# EAGLE board Alimentacion_doble (EAGLE 7.7.0)
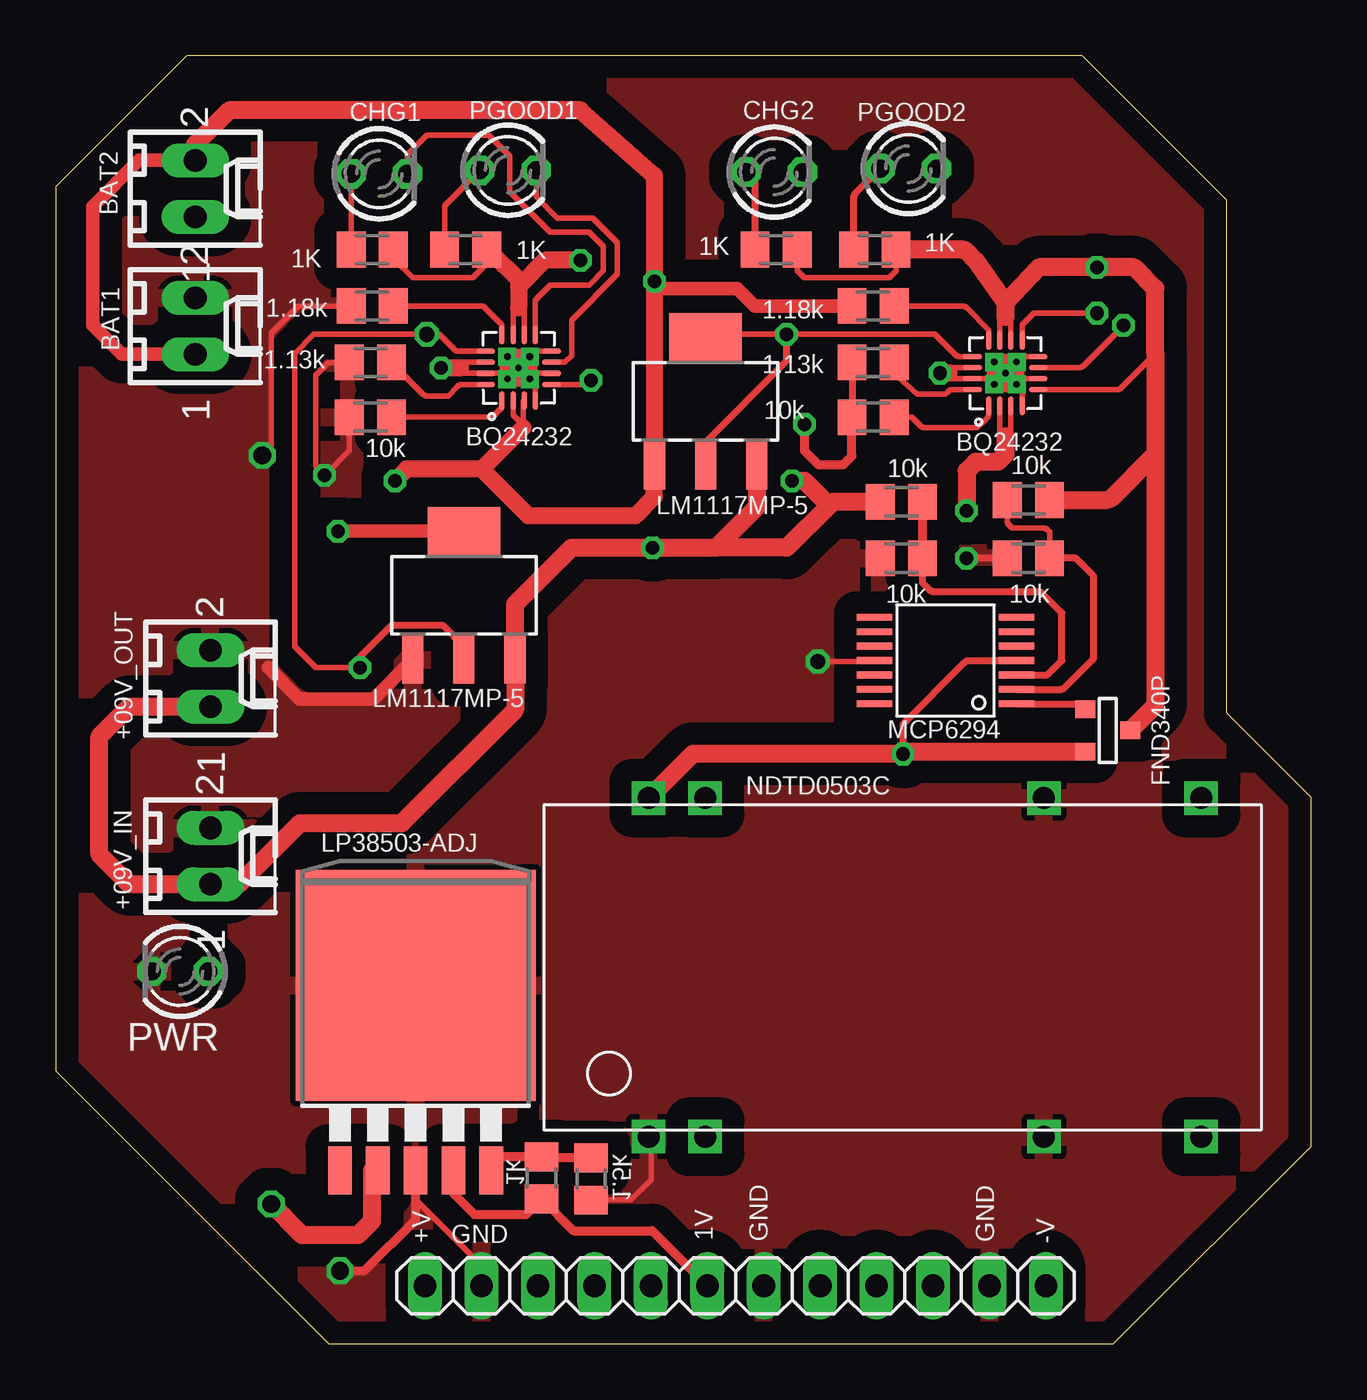
[diagram p0: board, top side]
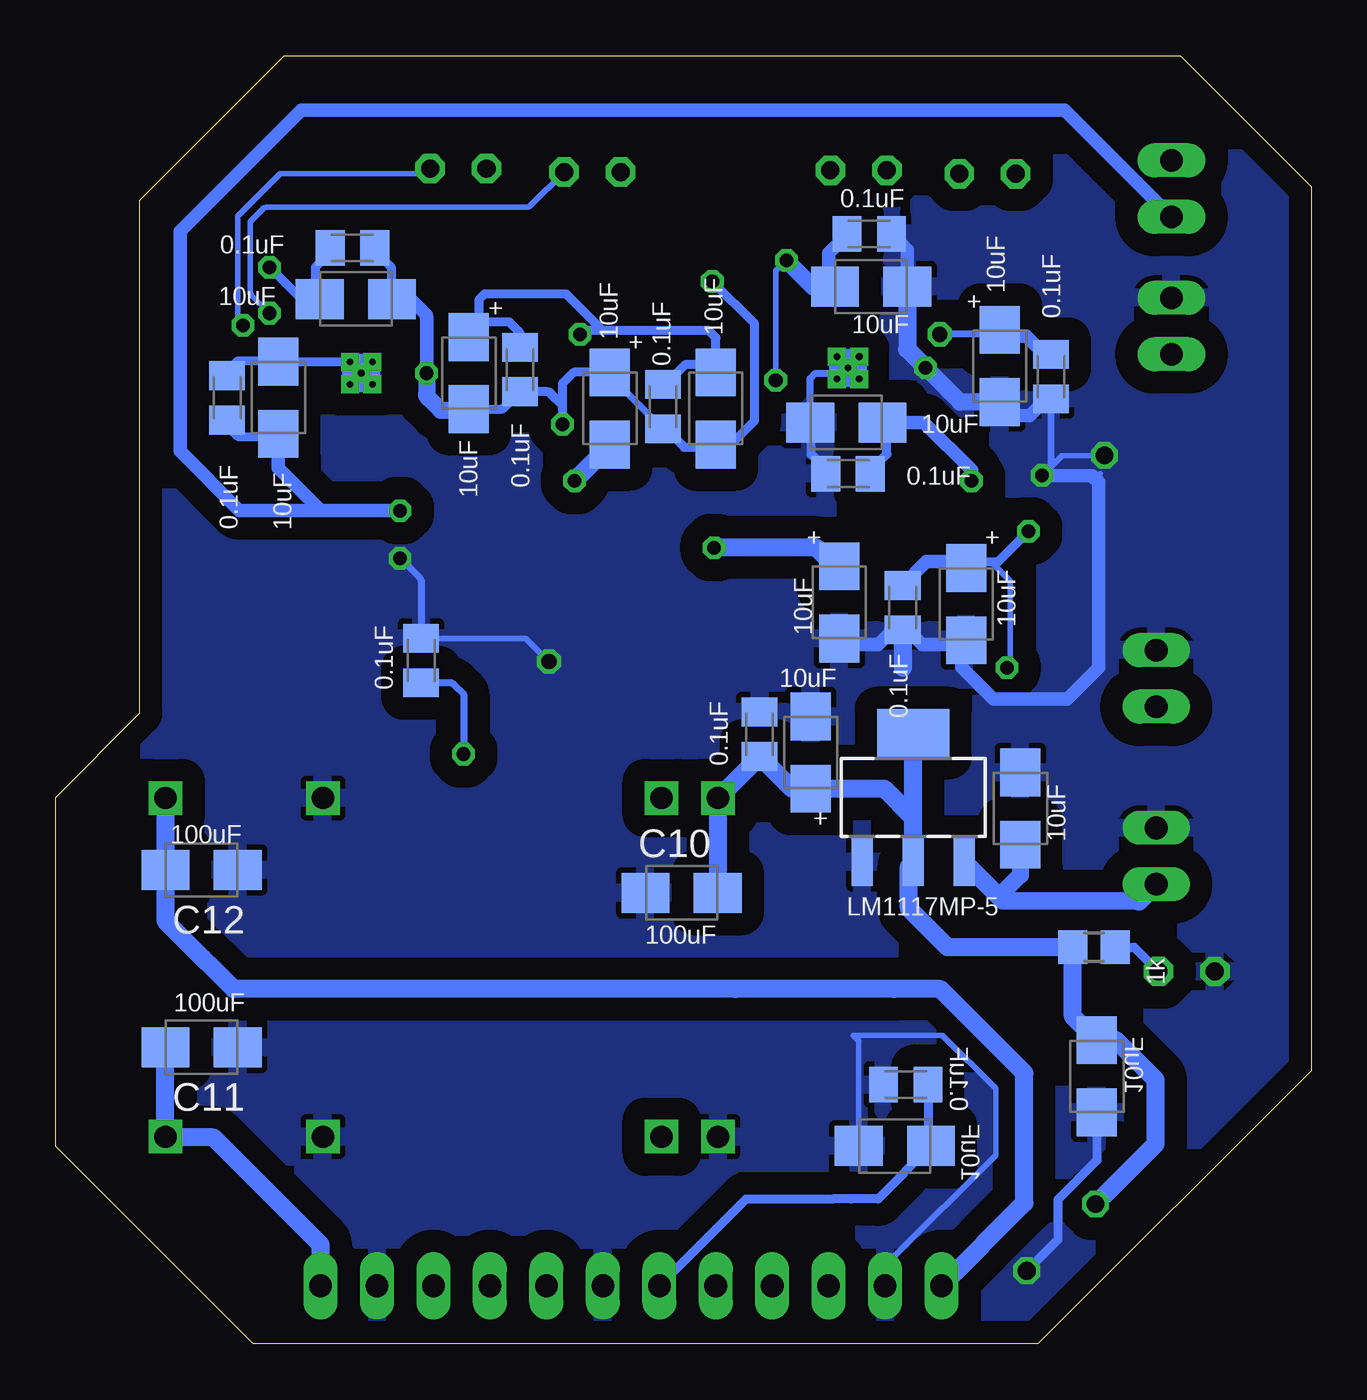
[diagram p1: board, bottom side, seen from below]

Size 56.5 x 58 mm. Coordinates in mm from the lower left corner, seen from the top.
Outline: 12.3,0 47.6,0 56.5,8.9 56.5,24.6 52.7,28.4 52.7,51.5 46.2,58 5.9,58 0,52.1 0,12.3 12.3,0
Copper layers (1*16): Top 0.035mm / dielectric 1.5mm / Bottom 0.035mm
Design rules "default": minimum track width 10mil, minimum drill 24mil, track to track 8mil, track to pad 8mil, pad to pad 8mil, via to via 8mil, smd to smd 8mil, copper to edge 40mil, drill to drill 8mil, minimum pad ring 10mil, minimum via ring 8mil, stop-mask expansion 4mil, vias tented up to drill 0mil, thermal gap 10mil

## Footprints (pad centres in the part's own frame; a part is rotated, then mirrored left to right if it is on the bottom)
C0805K = smd 1.3 x 1.6: 1 -1,0; 2 1,0
B/3528-21W = smd 2.15 x 1.8: + 1.625,0; - -1.625,0
TO263-5 = smd 1.067 x 2.159: 1 -3.404,-5.791; 2 -1.702,-5.791; 3 0,-5.791; 4 1.702,-5.791; 5 3.404,-5.791 | smd 10.8 x 10.41: 6 0,2.54
SOT223 = smd 0.95 x 2.15: 1 -2.3,-2.9; 2 0,-2.9; 3 2.3,-2.9 | smd 3.25 x 2.15: 4 0,2.9
6410-02 = drill 1.016 long: 1 1.27,0; 2 -1.27,0
1X12 = drill 1.016 long: 1 -13.97,0; 2 -11.43,0; 3 -8.89,0; 4 -6.35,0; 5 -3.81,0; 6 -1.27,0; 7 1.27,0; 8 3.81,0; 9 6.35,0; 10 8.89,0; 11 11.43,0; 12 13.97,0
LED3MM = drill 0.813 octagon: A -1.27,0; K 1.27,0
M0805 = smd 1.3 x 1.6: 1 -0.95,0; 2 0.95,0
R0805 = smd 1.3 x 1.5: 1 -0.95,0; 2 0.95,0
SOT-23 = smd 0.787 x 0.889: 1 0.025,-1.016; 2 -0.94,1.016; 3 0.991,1.016
BQ24232 = smd 0.85 x 0.25: 1 -1.475,0.75; 2 -1.475,0.25; 3 -1.475,-0.25; 4 -1.475,-0.75; 9 1.475,-0.75; 10 1.475,-0.25; 11 1.475,0.25; 12 1.475,0.75 | smd 0.25 x 0.85: 5 -0.75,-1.475; 6 -0.25,-1.475; 7 0.25,-1.475; 8 0.75,-1.475; 13 0.75,1.475; 14 0.25,1.475; 15 -0.25,1.475; 16 -0.75,1.475 | drill 0.3 pad 0.406 square: NA0 0,0; NA1 -0.5,0.5; NA2 0.5,0.5; NA3 -0.5,-0.5; NA4 0.5,-0.5
NDTD_CONVERTER = drill 1 square: 1 -0.295,27.56; 2 -0.295,25.02; 3 -0.295,9.78; 4 -0.295,2.7; 5 14.955,2.7; 6 14.955,9.78; 7 14.955,25.02; 8 14.955,27.56
MCP6294 = smd 1.6 x 0.3: VDD -3.2,0; VINA+ -3.2,0.65; VINA- -3.2,1.3; VINB+ -3.2,-0.65; VINB- -3.2,-1.3; VINC+ 3.2,-0.65; VINC- 3.2,-1.3; VIND+ 3.2,0.65; VIND- 3.2,1.3; VOUTA -3.2,1.95; VOUTB -3.2,-1.95; VOUTC 3.2,-1.95; VOUTD 3.2,1.95; VSS 3.2,0

## Placement (x,y rotation side)
C1  0.1uF  [C0805K]  48.78,42.59 90 bottom
C2  10uF  [B/3528-21W]  46.47,42.59 270 bottom
C3  0.1uF  [C0805K]  43.14,49.34 0 bottom
C4  0.1uF  [C0805K]  35.6,43.86 270 bottom
C5  10uF  [B/3528-21W]  42.98,47.04 180 bottom
C6  10uF  [B/3528-21W]  37.9,43.7 90 bottom
C7  0.1uF  [C0805K]  29.17,42.2 270 bottom
C8  10uF  [B/3528-21W]  26.79,42.12 90 bottom
C9  10uF  [B/3528-21W]  31.55,42.12 270 bottom
C10  [B/3528-21W]  28.33,20.31 0 bottom
C11  [B/3528-21W]  49.93,13.36 180 bottom
C12  [B/3528-21W]  49.93,21.34 180 bottom
C13  0.1uF  [C0805K]  18.24,11.67 180 bottom
C14  10uF  [B/3528-21W]  18.73,8.91 0 bottom
C15  10uF  [B/3528-21W]  9.64,12.05 90 bottom
C16  10uF  [B/3528-21W]  13.08,24.1 270 bottom
C17  10uF  [B/3528-21W]  22.52,26.62 90 bottom
C18  0.1uF  [C0805K]  24.82,27.45 270 bottom
C55  0.1uF  [C0805K]  18.38,33.15 270 bottom
C56  10uF  [B/3528-21W]  15.52,33.31 90 bottom
C57  10uF  [B/3528-21W]  21.23,33.39 90 bottom
C63  0.1uF  [C0805K]  40.05,30.77 90 bottom
C64  0.1uF  [C0805K]  20.84,39.18 180 bottom
C65  0.1uF  [C0805K]  19.88,49.98 0 bottom
C66  0.1uF  [C0805K]  11.71,43.55 270 bottom
C67  10uF  [B/3528-21W]  20.92,41.48 0 bottom
C68  10uF  [B/3528-21W]  19.8,47.59 180 bottom
C69  10uF  [B/3528-21W]  14.01,44.02 90 bottom
E$1  [TO263-5]  16.2,13.6 0 top
IC1  LM1117MP-5.0  [SOT223]  29.25,42.43 0 top
IC3  LM1117MP-5.0  [SOT223]  18.38,33.7 0 top
IC4  LM1117MP-5.0  [SOT223]  17.9,24.6 0 bottom
J1  LED_BAT  [6410-02]  6.29,45.82 270 top
J2  LED_BAT  [6410-02]  6.29,52.01 270 top
J3  +12V_OUT  [6410-02]  6.97,21.96 270 top
J4  +12V_IN  [6410-02]  6.97,29.96 270 top
JP1  [1X12]  30.6,2.62 0 top
LED1  [LED3MM]  38.38,52.91 0 top
LED2  [LED3MM]  32.35,52.75 0 top
LED6  [LED3MM]  20.36,52.83 0 top
LED12  [LED3MM]  14.57,52.67 0 top
PWR  PWR  [LED3MM]  5.6,16.77 180 top
R1  1K  [M0805]  36.87,49.26 0 top
R2  1K  [M0805]  32.42,49.26 0 top
R3  1.18k  [M0805]  36.79,46.72 180 top
R4  1.13k  [M0805]  36.79,44.18 180 top
R5  10k  [M0805]  36.79,41.72 180 top
R6  1K  [R0805]  21.87,7.48 90 top
R7  1K  [R0805]  24.1,7.43 270 top
R34  10k  [M0805]  43.78,37.99 180 top
R35  10k  [M0805]  43.78,35.37 180 top
R36  10k  [M0805]  38.06,37.91 0 top
R37  10k  [M0805]  38.06,35.37 180 top
R45  1K  [R0805]  9.77,17.86 180 bottom
R46  1K  [M0805]  18.45,49.26 0 top
R47  1K  [M0805]  14.25,49.26 0 top
R48  1.18k  [M0805]  14.25,46.72 180 top
R49  1.13k  [M0805]  14.17,44.18 180 top
R50  10k  [M0805]  14.17,41.72 180 top
T1  T1  [SOT-23]  47.35,27.59 90 top
U$1  U7  [BQ24232]  42.74,43.7 90 top
U$2  NDTD_CONVERTER  [NDTD_CONVERTER]  54.25,9.62 90 top
U$7  U7  [BQ24232]  20.84,43.94 90 top
U$10  U10  [MCP6294]  40.05,30.77 180 top

## Library data of the parts
C1-C18 C55-C57 C63-C69 R1-R7 R34-R37 R45-R50 = rcl
E$1 = MIC29302WU
IC1 IC3 IC4 = lm1117_10; MF: Texas Instruments; MPN: LM1117MP-5.0; OC_FARNELL: 9778209; OC_NEWARK: 28X3417
J1-J4 = con-molex; OC_FARNELL: unknown; OC_NEWARK: unknown
JP1 = pinhead
LED1 LED2 LED6 LED12 PWR = led
T1 = zetex; OC_FARNELL: unknown; OC_NEWARK: unknown
U$1 U$7 = Texas_IC_BAT
U$2 = NDTD_CONVERTER
U$10 = mcp6294

## Nets
1V: C13.1 C14.+ E$1.4 JP1.6 R6.1
5V_GND: C55.1 C56.+ C66.1 C69.+ IC3.2 IC3.4 U$7.13
5V_VREF: C4.1 C6.+ C7.1 C8.+ IC1.2 IC1.4 U$1.13
+3,3V: C12.+ JP1.1 U$2.5
+9V: C9.+ C16.+ C57.+ IC1.3 IC3.3 IC4.3 J3.1 J4.1 R36.1
-3,3V: C11.+ JP1.12 U$2.4
ADJ: E$1.5 R6.2 R7.1
BAT: C1.1 C2.+ J2.1 U$1.2 U$1.3
CHG: LED2.K U$1.9
CHG1: LED12.K U$7.9
COM_BAT: R34.2 R35.1 U$10.VINA-
COM_NET: R36.2 R37.1 U$10.VINA+
GATE_CMD: T1.3 U$10.VOUTA
GND: C10.- C11.- C12.- C13.2 C14.- C15.- C16.- C17.+ C18.1 C55.2 C56.- C57.- C63.2 C64.2 C65.2 C66.2 C67.- C68.- C69.- E$1.3 E$1.6 IC3.1 IC4.1 J1.2 J3.2 J4.2 JP1.2 JP1.7 JP1.11 PWR.K R7.2 R35.2 R37.2 R48.2 R49.2 R50.2 U$2.1 U$2.3 U$2.6 U$7.4 U$7.6 U$7.8 U$7.14 U$7.15 U$7.NA0 U$7.NA1 U$7.NA2 U$7.NA3 U$7.NA4 U$10.VSS
ILIM: R3.1 U$1.12
ILIM1: R48.1 U$7.12
ISET: R4.1 U$1.16
ISET1: R49.1 U$7.16
N$1: LED1.A R1.1
N$2: LED2.A R2.1
N$7: U$2.2
N$27: PWR.A R45.1
N$28: LED6.A R46.1
N$29: LED12.A R47.1
OUT_CH: C3.1 C5.+ R1.2 R2.2 R34.1 T1.1 U$1.5 U$1.10 U$1.11
OUT_CH1: C65.1 C68.+ R46.2 R47.2 U$7.5 U$7.10 U$7.11
PGOOD: LED1.K U$1.7
PGOOD1: LED6.K U$7.7
TS: R5.1 U$1.1
TS1: R50.1 U$7.1
V_IN: C10.+ C15.+ C17.- C18.2 C63.1 E$1.2 IC4.2 IC4.4 R45.2 T1.2 U$2.8 U$10.VDD
VREF: C1.2 C2.- C3.2 C4.2 C5.- C6.- C7.2 C8.- C9.- C64.1 C67.+ IC1.1 J1.1 J2.2 R3.2 R4.2 R5.2 U$1.4 U$1.6 U$1.8 U$1.14 U$1.15 U$1.NA0 U$1.NA1 U$1.NA2 U$1.NA3 U$1.NA4 U$7.2 U$7.3

## Tracks (layer width: path | path; a pad name or v marks a point on that pad's centre or on a via)
1V
  Top 0.406: E$1.4 17.91,7.88 17.84,7.95 | E$1.4 | E$1.4 17.91,6.77 18.86,5.82 21.16,5.82 R6.1 23.3,5.1 26.85,5.1 JP1.6
  Bottom 0.406: C13.1 17.24,9.04 C14.+ 19.48,6.53 20.7,6.53 21.52,6.53 25.42,6.53 JP1.6
5V_GND  (via drill 0.61, 0.69)
  Top 0.254: U$7.13 18.02,44.69 17.26,45.45 v16.71,45.45 11.63,45.45 10.76,44.58 10.76,31.4 11.71,30.45 v13.69,30.45
  Top 0.305: 18.38,30.37 IC3.2 | v13.69,30.45 13.69,30.92 15.12,32.35 17.42,32.35 18.38,31.4
  Top 0.61: v12.71,36.59 18.36,36.59 IC3.4
  Top 0.813: 18.38,31.4 IC3.2
  Bottom 0.254: 13.69,46.16 13.85,46.32 13.85,45.81 C69.+ | 15.8,35.21 14.41,35.21 13.53,34.34 13.53,30.61 v13.69,30.45
  Bottom 0.305: 13.69,46.16 14.41,45.45 v16.71,45.45
  Bottom 0.406: 17.31,35.21 14.09,35.21 v12.71,36.59
  Bottom 0.61: 15.8,35.21 17.31,35.21 C55.1 | C66.1 11.99,44.55 12.82,45.37 13.73,45.37 C69.+
  Bottom 0.813: C55.1 18.33,34.15 | 15.8,35.21 C56.+
5V_VREF  (via drill 0.61)
  Top 0.254: U$1.13 40.67,44.45 arc-45 40.49,44.53 39.57,45.45 v32.9,45.45 29.37,45.45 IC1.4
  Top 0.305: IC1.2 29.25,40.61 32.9,44.26 v32.9,45.45
  Bottom 0.254: C6.+ 37.43,45.69
  Bottom 0.406: C7.1 29.04,43.2 28.14,44.1 27.15,44.1 C8.+ 26.79,45.29 27.11,45.61 31.87,45.61 | 37.43,45.69 37.43,47.04 37.19,47.28 33.54,47.28 31.87,45.61 | 31.87,45.61 32.74,45.61 v32.9,45.45 | C4.1 35.6,45.42 arc-45 35.67,45.6 36.08,46.01 37.88,46.01 arc-45 38.06,45.93 38.06,45.59 arc-45 37.99,45.41 C6.+
+3,3V
  Bottom 0.406: C12.+
  Bottom 0.813: C12.+ U$2.5 | C12.+ 51.55,19.05 50.77,18.27 49.87,17.36 | JP1.1 12.9,6.35 12.9,12.2 16.68,15.98 25.9,15.98
  Bottom 0.818: 18.77,15.98 25.9,15.98 48.49,15.98 50.77,18.27
+9V  (via drill 0.61)
  Top 0.813: IC1.3 31.55,37.67 29.73,35.85 | 29.73,35.85 32.9,35.85 34.81,37.75 | v33.14,38.86 33.7,38.86 34.81,37.75 | R36.1 34.97,37.91 34.81,37.75 | J4.1 3.32,28.69 1.97,27.34 1.97,22.04 3.32,20.69 J3.1 8.25,20.69 11.01,23.45 15.58,23.45 20.68,28.55 IC3.3 20.68,33.3 23.22,35.85 v26.86,35.85 29.73,35.85
  Bottom 0.406: C9.+ 31.55,40.45
  Bottom 0.762: 13.86,19.95 14.05,20.14 13.08,21.11 C16.+
  Bottom 0.813: C57.+ 21.43,35.01 22.27,35.85 v26.86,35.85 | 31.55,40.45 v33.14,38.86 | J3.1 7.74,19.91 13.86,19.95 | 14.05,20.14 IC4.3
-3,3V
  Bottom 0.406: U$2.4
  Bottom 0.813: U$2.4 C11.+ | JP1.12 44.57,4.47 49.4,9.3 51.52,9.3 U$2.4
ADJ
  Top 0.406: R7.1 21.87,8.38 R6.2 19.9,8.43 | 19.9,8.43 19.54,8.43 19.54,7.95 | E$1.5 19.9,7.81 19.9,8.43
BAT  (via drill 0.61)
  Top 0.254: 42.49,40.8 arc45 42.57,41.02 | 42.57,41.02 42.74,40.85 42.92,41.02 | 42.99,40.8 arc-45 42.92,41.02 | U$1.3 42.99,41.1 42.92,41.02 | U$1.2 42.49,41.1 42.57,41.02
  Top 0.813: 42.74,40.85 42.74,40.04 42.4,39.7 41.4,39.7 41,39.3 v41,37.52 v41,37.51
  Bottom 0.406: C1.1 49.15,41.59 arc45 48.97,41.52 48.3,40.85 47.02,40.85 arc-45 46.84,40.92 C2.+
  Bottom 0.61: v41,37.51 44.46,37.51 | 44.46,37.51 arc45 44.64,37.59 46.47,39.42 C2.+ | 44.46,37.51 48.22,37.51 50.9,40.19 50.9,50.09 45.45,55.54 11.08,55.54 J2.1
CHG  (via drill 0.61)
  Top 0.254: U$1.9 43.49,45.78 arc-45 43.57,45.96 44.01,46.4 v46.87,46.4
  Bottom 0.254: v46.87,46.4 47.67,47.2 arc45 47.74,47.38 47.74,50.53 47.18,51.09 arc45 47,51.17 35.31,51.17 arc-45 35.13,51.24 LED2.K
CHG1
  Top 0.254: 21.59,45.88 U$7.9 21.59,46.99 22.27,47.67 24.01,47.67 24.65,48.31 24.65,49.42 24.01,50.05 22.27,50.05 20.44,51.88 20.44,53.47 19.49,54.42 16.71,54.42 15.84,53.55 LED12.K
COM_BAT
  Top 0.254: R34.2 42.83,37.06 arc45 42.9,36.88 43.06,36.72 44.46,36.72 arc-45 44.64,36.65 44.73,36.56 R35.1 arc-45 R35.1
  Top 0.305: U$10.VINA- 45.23,29.47 arc45 45.41,29.54 46.71,30.85 46.71,34.47 arc45 46.64,34.65 45.92,35.37 R35.1
COM_NET
  Top 0.305: U$10.VINA+ 44.63,30.12 45.28,30.77 45.28,32.91 44.41,33.79 arc45 44.23,33.86 39.52,33.86 arc-45 39.34,33.94 39.01,34.26 39.01,35.92 arc45 39.01,35.93
  Top 0.406: R36.2 39.01,35.93 R37.1
GATE_CMD
  Top 0.305: U$10.VOUTA 45.99,28.82 arc-45 46.17,28.74 T1.3
GND  (via drill 0.61, 0.69, 0.8)
  Top 0.254: 13.22,40.37 R50.2 13.22,40.21 v12.11,39.1 11.78,39.42 arc-45 11.71,39.6 11.71,43.62 12.26,44.18 R49.2 | 20.19,43.69 U$7.15 18.23,43.69 18.22,43.94 | 20.19,43.69 20.2,43.7 | U$7.14 18.07,44.19 18.06,43.94 | U$7.NA3 21.55,43.23 | U$7.4 21.59,43.19 U$7.NA3 | U$7.6 21.59,43.69 U$7.NA3 | U$7.NA3 U$7.NA0 | 20.19,43.69 20.34,43.55 U$7.NA1 U$7.NA0 | U$7.NA0 U$7.NA4 21.59,44.69 U$7.8 | U$7.NA0 U$7.NA2 | U$10.VSS 36.8,30.72 v34.3,30.72 | R7.2 25.88,6.48 26.8,7.4 26.8,9.21 U$2.1 | 19.17,3.53 16.2,6.5 | R48.2 10.92,46.72 9.7,45.5 9.7,40.4 v9.3,40
  Top 0.305: R35.2 v41,35.37 | R37.2
  Top 0.406: v12.8,3.3 13.9,3.3 16.2,5.6 16.2,6.5 E$1.3
  Top 0.61: 6.52,47.33 J1.2 | 9.56,30.45 10.98,29.04 14.31,29.04 IC3.1
  Top 0.762: v17.34,43.94 18.06,43.94 18.22,43.94
  Top 0.813: 13.14,47.04 R48.2
  Bottom 0.254: 6.37,47.01 J1.2 | 13.41,41.8 13.3,41.8 | 9.49,39.17 arc45 9.67,39.1 v12.11,39.1 11.21,40 v9.3,40 | 40.05,32.44 C63.2 35.35,31.77 v34.3,30.72 | C14.- 20.36,13.66 20.6,13.9 16.6,13.9 14.2,11.5 14.2,8.5 18.85,3.85 18.85,2.94 JP1.2
  Bottom 0.305: C67.- 22.54,43.46 U$7.6 21.59,43.69 U$7.NA3 | v41,35.37 40.12,34.49 arc45 40.05,34.31 C63.2 | C66.2 11.71,39.6 arc45 11.78,39.42 v12.11,39.1
  Bottom 0.406: C64.2 21.84,39.39 22.5,40.05 22.5,41.44 C67.- | C15.- 9.64,8.26 11.4,6.5 11.4,4.7 v12.8,3.3
  Bottom 0.61: 18.17,32.15 17.5,31.48 15.72,31.48 15.72,30.45 14.31,29.04 10.98,29.04 9.56,30.45 9.56,38.79 9.88,39.1 v12.11,39.1 | 18.82,32.15 19.49,31.48 20.95,31.48 | C68.- 18.18,49.27 C65.2 | C66.2 11.91,42.55 12.66,41.8 13.41,41.8 C69.- | 16.39,42.99 16.31,42.91 | C57.- 21.27,31.72
  Bottom 0.762: C69.- 15.8,42.4 16.31,42.91 v17.34,43.94 | 39.93,31.72 arc45 C63.2
  Bottom 0.813: C55.2 18.17,32.15 | 15.72,31.48 C56.- 15.48,31.64 | C55.2 18.82,32.15 | 20.95,31.48 C57.- | C55.2 18.38,30.45 | C68.- 18.18,44.78 v17.34,43.94
  pour Top (isolate 1.016): 0,12.3 0,52.1 5.9,58 46.2,58 52.7,51.5 52.7,28.4 56.5,24.6 56.5,8.9 47.6,0 12.3,0
  pour Bottom (isolate 1.016): 0,12.3 0,52.1 5.9,58 46.2,58 52.7,51.5 52.7,28.4 56.5,24.6 56.5,8.9 47.6,0 12.3,0
ILIM
  Top 0.254: U$1.12 41.99,45.65 40.99,46.65 arc45 40.81,46.72 R3.1
ILIM1
  Top 0.254: U$7.12 20.09,45.88 19.25,46.72 R48.1
ISET
  Top 0.254: R4.1 37.74,43.73 arc45 37.89,43.55 38.77,42.75 40.05,42.75 40.17,42.88 arc-45 40.35,42.95 U$1.16
ISET1
  Top 0.254: U$7.16 18.29,43.19 arc45 18.11,43.12 17.66,42.67 16.73,42.67 arc-45 16.55,42.75 R49.1
N$1
  Top 0.305: R1.1 35.92,51.62 arc-45 35.99,51.8 LED1.A
N$2
  Top 0.305: R2.1 31.48,52.25 arc45 31.4,52.43 LED2.A
N$27
  Bottom 0.406: R45.1 7.96,17.86 PWR.A
N$28
  Top 0.254: R46.1 17.5,51.25 LED6.A
N$29
  Top 0.254: LED12.A R47.1
OUT_CH  (via drill 0.61)
  Top 0.254: U$1.11 42.49,46.24 | 42.49,46.24 42.49,46.31 42.51,46.32 | U$1.10 42.99,46.31 42.98,46.32 42.82,46.32 42.74,46.24 42.49,46.24 | U$1.5 47.76,42.95 arc45 47.94,43.03 49.49,44.58 | R1.2 37.82,48.31 37.51,47.99 33.7,47.99 33.38,48.31 R2.2
  Top 0.762: v46.87,48.47 arc-45 47.09,48.41 | 49.49,28.85 arc-45 49.42,28.67 | 47.32,37.99 arc45 47.5,38.06
  Top 0.813: 42.74,46.88 42.74,46.24 | 42.74,46.88 44.25,48.47 v46.87,48.47 48.53,48.47 49.49,47.51 49.49,44.58 49.49,40.05 | 42.74,46.88 41.39,48.78 40.99,49.19 arc45 40.81,49.26 R1.2 | 49.49,40.05 49.49,28.85 | 49.42,28.67 T1.1 | R34.1 47.32,37.99 | 47.5,38.06 49.49,40.05
  Bottom 0.254: 44.81,48.47 44.81,47.12 45.5,47.12
  Bottom 0.406: C3.1 44.14,49.24 arc45 44.22,49.06 44.81,48.47 44.81,47.34 arc-45 44.73,47.16 C5.+ | 45.5,47.12 arc45 45.54,47.14 v46.87,48.47
OUT_CH1  (via drill 0.61)
  Top 0.254: 21.07,46.96 21.09,46.95 21.09,46.8 | U$7.11 20.59,46.64 | 20.59,46.64 20.59,46.87 | U$7.10 21.09,46.8 | 21.09,46.8 20.93,46.64 20.84,46.64 20.59,46.64 | U$7.5 23.9,43.19 v24.09,43.39 | R46.2 19.41,48.62 18.77,47.99 16.07,47.99 15.2,48.87 R47.2
  Top 0.762: 20.83,47.59 20.83,47.83 20.83,47.91 19.73,49.02 R46.2 | 20.83,47.59 20.84,46.64 | v23.61,48.78 22.02,48.78 20.83,47.59
  Bottom 0.254: v24.09,43.39 24.09,48.31 v23.61,48.78
  Bottom 0.61: C65.1 20.88,49.93 21.71,49.1 21.71,47.87 C68.+
  Bottom 0.762: C68.+ 22.42,47.59 v23.61,48.78
PGOOD  (via drill 0.61)
  Top 0.254: U$1.7 46.06,43.95 arc45 46.24,44.03 v48.06,45.85
  Bottom 0.254: LED1.K 40.28,52.67 46.4,52.67 48.3,50.77 48.3,46.19 arc-45 48.23,46.01 v48.06,45.85
PGOOD1
  Top 0.254: U$7.7 22.91,44.19 23.22,44.5 23.22,46.09 25.28,48.15 25.28,49.58 24.17,50.69 22.58,50.69 21.63,51.64 LED6.K
TS
  Top 0.254: U$1.1 41.99,41.87 arc-45 41.92,41.69 41.47,41.24 39.12,41.24 arc-45 38.94,41.32 38.54,41.72 R5.1
TS1
  Top 0.254: U$7.1 20.09,42.16 19.65,41.72 R50.1
V_IN  (via drill 0.61, 0.8)
  Top 0.305: U$10.VDD 41.1,30.77 arc45 40.92,30.69 38.14,27.91 v38.14,26.56
  Top 0.406: 14.44,7.95 14.23,8.16 14.23,7.81 E$1.2 14.5,7.2
  Top 0.813: 14.23,7.81 14.23,5.53 13.6,4.9 11.1,4.9 v9.7,6.3 | T1.2 38.14,26.65 v38.14,26.56 28.67,26.56 U$2.8
  Bottom 0.305: C63.1 38.75,29.77 arc45 38.57,29.69 38.14,29.26 v38.14,26.56
  Bottom 0.406: C10.+ 26.69,20.32 | U$2.8 26.59,24.57 | C15.+ | 18.1,21.51 IC4.2
  Bottom 0.762: 26.41,24.86 U$2.8 | C18.2
  Bottom 0.813: 26.69,20.32 U$2.8 C18.2 | IC4.2 17.9,23.69 | 17.9,23.69 IC4.4 | 17.9,23.69 19.21,25 C17.- 23.36,25 C18.2 | v9.7,6.3 7,9 7,11.9 8.78,13.68 C15.+ | 18.1,21.51 18.1,19.6 16.36,17.86 R45.2 10.72,14.75 C15.+
VREF  (via drill 0.61)
  Top 0.254: U$1.14 40.22,43.95 40.14,43.88 40.14,43.77 | 40.14,43.45 U$1.15 41.99,43.45 U$1.NA1 42.24,43.25 | 40.14,43.45 40.12,43.47 | 42.24,43.25 42.03,43.47 | U$1.NA4 43.46,44.42 | U$1.8 43.49,44.45 U$1.NA4 | U$1.4 43.49,42.95 U$1.NA3 | U$1.NA3 43.24,43.25 43.46,43.47 | U$1.6 43.49,43.45 U$1.NA3 | 42.24,43.25 42.29,43.25 U$1.NA0 | U$1.NA2 U$1.NA0 | U$1.NA0 U$1.NA4 | U$1.NA0 U$1.NA3 | 40.14,43.45 40.14,43.77 | 40.14,43.77 40.2,43.7 | 21.04,41.24 21.04,41.36 | 21.04,41.36 21.04,42.42 U$7.3 | U$7.2 20.59,41.81 21.04,41.36
  Top 0.305: R4.2 35.84,41.17 35.84,41.16
  Top 0.406: v33.7,41.4 33.7,40.21 34.33,39.58 35.44,39.58 35.84,39.97 35.84,41.16 35.84,41.32 R5.2
  Top 0.61: R3.2 31.47,46.72 30.68,47.51 27.27,47.51 v26.95,47.83 | J2.2 3.75,53.28 1.67,51.2 1.67,45.86 2.98,44.55 | 2.98,44.55 | J1.1 2.98,44.55
  Top 0.762: v39.81,43.7 40.2,43.7 | IC1.1 v26.95,47.83 26.95,52.59 23.61,55.53 | IC1.1 26.95,38.15 26.08,37.28 21.29,37.28 19.18,39.38 | 19.18,39.38 21.04,41.24 | 19.18,39.38 15.8,39.38 v15.28,38.86
  Top 0.813: IC1.1 | J2.2 6.29,54 7.82,55.53 23.61,55.53
  Bottom 0.305: C7.2 31.48,43.5 arc45 31.55,43.68 C9.-
  Bottom 0.406: 31.35,43.94 C9.- 33.18,43.74 33.7,43.23 33.7,42.28 | C7.2 29.04,41.2 28.22,40.37 26.91,40.37 | 26.91,40.37 C8.- | 33.7,42.28 34.21,42.79 arc-45 34.39,42.86 C4.2 36.31,42.15 arc45 36.49,42.08 C6.- | 33.7,42.28 v33.7,41.4 | C64.1 19.84,39.31 19.09,40.05 19.09,41.28 C67.+ | 26.91,40.37 26.23,40.37 25.04,41.56 25.04,45.93 v26.95,47.83 | C3.2 42.14,49.32 arc-45 42.07,49.14 41.39,48.47 41.39,47.13 arc-45 C5.- | C1.2 49.07,43.59 arc-45 48.89,43.67 48.3,44.26 46.89,44.26 arc45 C2.- 43.36,44.22 arc45 43.18,44.14 U$1.NA0
  Bottom 0.61: v15.28,38.86 15.28,39.34 17.42,41.48 C67.+ | v39.81,43.7 39.81,46.22 arc-45 39.88,46.4 40.68,47.2 41.09,47.2 arc-45 41.27,47.12 C5.-
  Bottom 0.762: 38.02,42.4 C6.- arc45 38,42.04 39.17,42.04 39.73,42.6 arc45 39.81,42.78 v39.81,43.7

## Text on the board
tPlace: CHG1 | PGOOD1 | CHG2 | PGOOD2 | BAT2 | BAT1 | BQ24232 | BQ24232 | LM1117MP-5 | LM1117MP-5 | MCP6294 | +09V_OUT | NDTD0503C | FND340P | LP38503-ADJ | +09V_IN | 1.5k | 1k | 1V | +V | GND | GND | GND | -V
bPlace: + | + | + | + | + | 10uF | 0.1uF | 10uF | + | 100uF | LM1117MP-5 | 100uF | 1k | 100uF | 10uF | 10uF | 0.1uF